# Altium PCB PCB1.PcbDoc
Units mm, origin at the board's own origin, x right, y up, seen from the top; angles counter-clockwise.
Board outline 29.05 x 20.1 mm, 2 copper layers (Top Layer, Bottom Layer); 21 components, 16 nets, 84 pads, 66 vias.
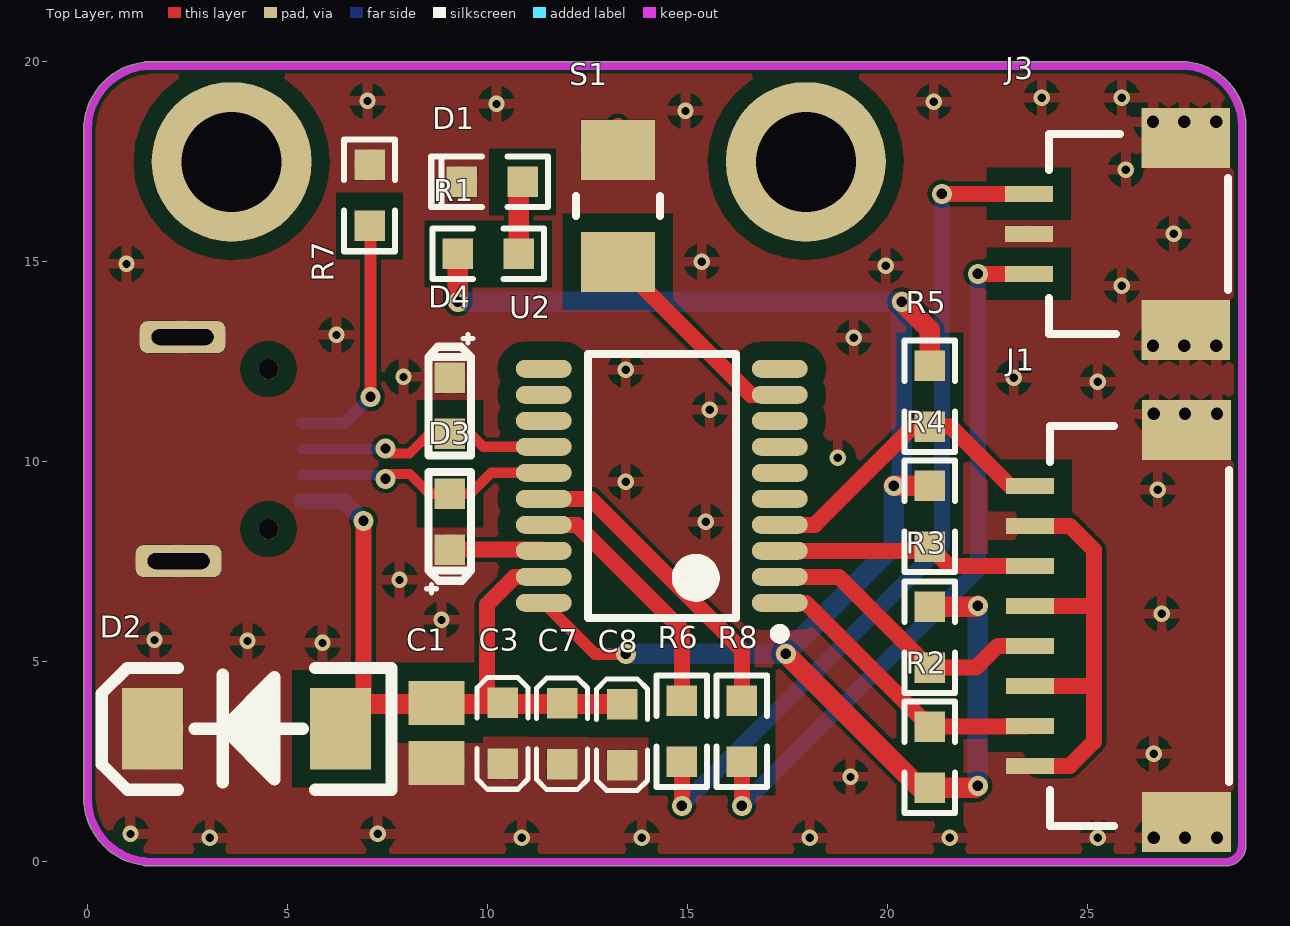
[diagram p0: Top Layer view]
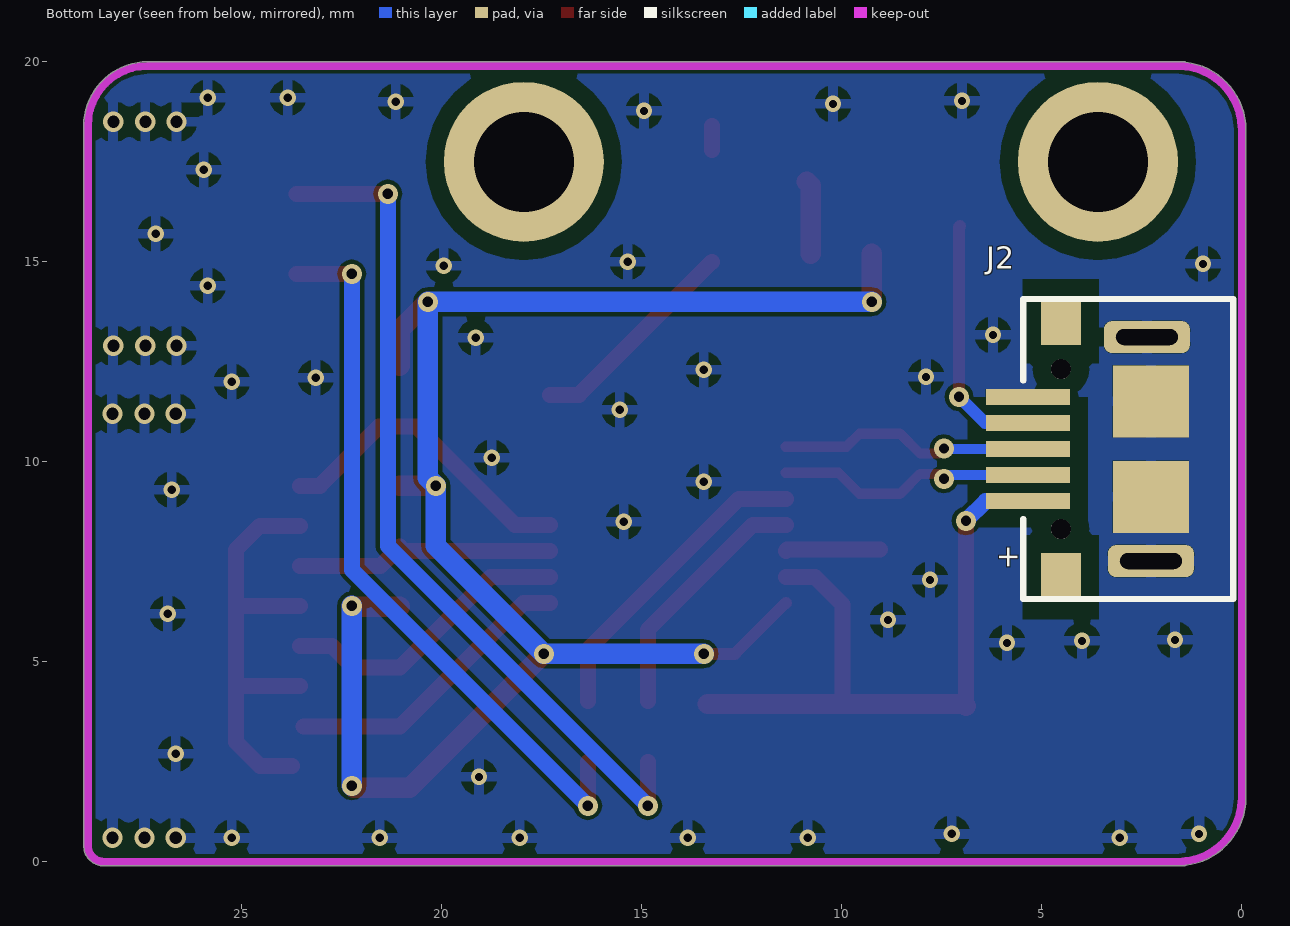
[diagram p1: Bottom Layer view, seen from below]
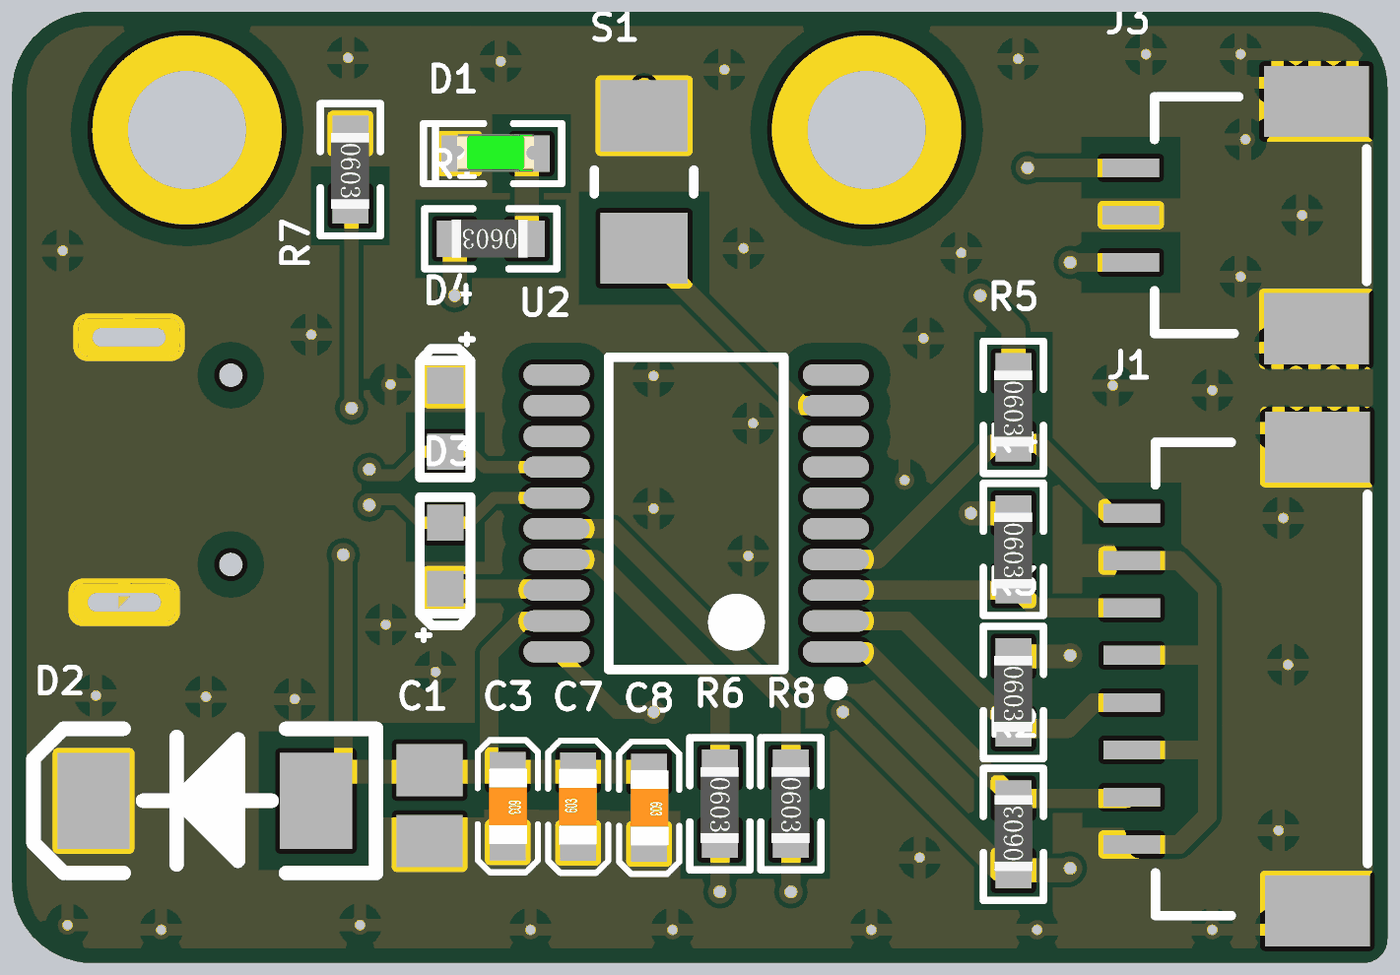
[diagram p2: 3D render of the assembled board from above, using the file's embedded part models]

## Layer stack, top to bottom
Top Solder: solder mask 0.0102, Solder Resist, Dk 3.5
Top Layer: signal copper 0.0356
Dielectric 1: dielectric 0.32, FR-4, Dk 4.8
Bottom Layer: signal copper 0.0356
Bottom Solder: solder mask 0.0102, Solder Resist, Dk 3.5

## Board outline
1.408,-0.089 cw(c1.605,1.6) -0.095,1.6 cw(c0.005,1.6) -0.095,1.601 -0.095,18.3 cw(c1.605,18.3) 1.408,19.989 cw(c1.455,19.9) 1.455,20 27.355,20 cw(c27.355,18.4) 28.955,18.4 28.955,0.4 cw(c28.455,0.4) 28.455,-0.1 1.455,-0.1 cw(c1.455,0)

## Design rules (kind name [scope] priority, off if disabled: settings)
Clearance Clearance_1 [All] p1: gap=0.1 except(0.45: SMDPad-Poly THPad-Poly)
DiffPairsRouting [All] p1: maxlimit=0.254 minlimit=0.254 mostfreqgap=0.254 toplayer_minwidth=0.254 toplayer_maxwidth=0.381 toplayer_prefwidth=0.254 bottomlayer_minwidth=0.254 bottomlayer_maxwidth=0.381 bottomlayer_prefwidth=0.254 maxuncoupledlength=12.7
MinimumSolderMaskSliver [All] p1: minsoldermaskwidth=0.051
PlaneConnect PlaneConnect_1 [All] p1: planeconnectstyle=Relief reliefexpansion=0.508 reliefentries=4 reliefconductorwidth=0.254 reliefairgap=0.254
PolygonConnect [ISVIA] p1: connectstyle=Relief reliefconductorwidth=0.254 reliefentries=4 polygonreliefangle="90 Angle" airgapwidth=0.254
RoutingVias [All] p1: holewidth=0.254 width=0.5 viastyle="Through Hole" minholewidth=0.254 minwidth=0.5 maxholewidth=0.3 maxwidth=0.8
SilkToSilkClearance [All] p1: silktosilkclearance=0.051
SilkToSolderMaskClearance [IsPad] p1: minsilkscreentomaskgap=0.051 clearancetoexposedcopper=TRUE
SolderMaskExpansion [All] p1: expansion=0.102
Width [All] p1: maxlimit=0.8 minlimit=0.254 preferedwidth=0.3
25 further rules are at their usual default settings.

## Classes and differential pairs
differential pair NewDifferentialPair1: +DP -DM

## Components (designator, comment, footprint, x,y, rotation, side; value= is the part's Value field where it differs from the comment)
C1 "226M50V" C0805 8.725,3.223 r270 top
C3 "105K16V" C0603 10.375,3.972 r270 top
C7 "106K50V" C0603 11.861,2.438 r90 top
C8 "104K50V" C0603 13.361,3.938 r270 top
D1 "LED0603G" D-LED0603G 10.879,17 r180 top
D2 "SMAJ5.0CA" DO-214 6.325,3.323 r180 top
D3 "ESDA_TR1/0603" HS_0603D 9.055,8.501 r90 top
D4 "ESDA_TR1/0603" HS_0603D 9.055,11.4 r270 top
J1 "SH1.0-T-1-LT-8A_卧式" J-SH1.0-T-1-LT-8A_卧式 23.555,2.4 r90 top
J2 "USB-MINI-SOCKET" "MICRO-USB - 5.9" 0.218,6.568 r90 bottom
J3 "SH1.0-T-1-LT-3A_卧式" J-SH1.0-T-1-LT-3A_卧式 23.535,14.7 r90 top
R1 "2K" R0603 10.779,15.2 r180 top
R2 "82K" R0603 21.055,1.852 r90 top
R3 "82K" R0603 21.055,6.376 r270 top
R4 "82K" R0603 21.055,9.4 r270 top
R5 "82K" R0603 21.055,12.4 r270 top
R6 "22R" R0603 14.855,4.024 r270 top
R7 "0R" R0603 7.05,17.422 r270 top
R8 "22R" R0603 16.355,4.024 r270 top
S1 "2*3*0.65" "S-K2*3 - duplicate" 13.255,16.4 r90 top
U2 "CH559T" TSSOP20 14.355,9.4 r180 top

## Footprints (in the part's own frame and the unit in brackets; to place one, negate y for a bottom-side part, rotate by r counter-clockwise, add the part's x,y. Pads: shape width x height; smd on the part's side, far side on the other; paste and mask are expansions set on the pad)
C0603 [mil]
  rect 30x30 smd: 1(0,0) 2(60,0)
  silkscreen extent -25,-25 85,25, body extent -1,-15 61,16, height 12
C0805 [mm] "Chip Capacitor, Body 2.0x1.3mm, IPC High Density"
  rect 1.1x1.4 smd: 1(-0.75,0) 2(0.75,0)
  body extent -1.1,-0.72 1.1,0.72, height 1.4
D-LED0603G [mil]
  rect 30x30 smd: 1(0,0) 2(60,0)
  silkscreen extent -25,-25 90,25, body extent -2,-16 62,15, height 24
DO-214 [mil]
  rect 60x80 smd: 1(0,0) 2(185,0)
  silkscreen extent -50,-60 235,60
HS_0603D [mil]
  rect 30x30 smd: 1(-27.5,0) 2(27.5,0)
  silkscreen extent -70,-21 49,23
J-SH1.0-T-1-LT-3A_卧式 [mm]
  rect 0.4x1.2 smd: 1(0,0) 2(1,0) 3(2,0)
  rect 1.5x2.22 smd: 4(-1.4,-3.92) 5(3.4,-3.92)
  silkscreen extent -1.5,-4.98 3.5,-0.5
J-SH1.0-T-1-LT-8A_卧式 [mm]
  rect 0.4x1.2 smd: 1(0,0) 2(1,0) 3(2,0) 4(3,0) 5(4,0) 6(5,0) 7(6,0) 8(7,0)
  rect 1.5x2.22 smd: 9(-1.4,-3.92) 10(8.4,-3.92)
  silkscreen extent -1.5,-4.98 8.5,-0.5
"MICRO-USB - 5.9" [mm]
  rect 1.2x1 smd: 0(0.55,4.307) 0(6.95,4.307)
  rect 0.4x2.1 smd: 1(2.45,5.132) 2(3.1,5.132) 3(3.75,5.132) 4(4.4,5.132) 5(5.05,5.132)
  rrect50% 0.8x2.15 hole 0.4 slot 1.55 at 90 deg: 6(0.95,2.057) 6(6.55,2.157)
  rect 1.8x1.9 smd: 6(2.556,2.057) 6(4.943,2.057)
  round 0.5 hole 0.5 unplated: ""(1.75,4.307) ""(5.75,4.307)
  silkscreen extent 0,0 7.5,5.25
R0603 [mil]
  rect 30x30 smd: 1(0,0) 2(60,0)
  silkscreen extent -25,-25 85,25, body extent 0,-16 62,15, height 18
"S-K2*3 - duplicate" [mm] "Precision Wire Wound Inductor, 2-Leads, Body 3.00x2.00mm, IPC Medium Density"
  rect 1.5x1.85 smd: 1(-1.4,0) 2(1.4,0)
  silkscreen extent -0.25,-1.05 0.25,1.05, body extent -1.55,-1.05 1.55,1.05, height 0.65
TSSOP20 [mm] "TSOP, 20-Leads, Body 6.50x4.40mm, Pitch 0.65mm, IPC Medium Density"
  oval 1.4x0.45 smd: 1(-2.95,2.925) 2(-2.95,2.275) 3(-2.95,1.625) 4(-2.95,0.975) 5(-2.95,0.325) 6(-2.95,-0.325) 7(-2.95,-0.975) 8(-2.95,-1.625) 9(-2.95,-2.275) 10(-2.95,-2.925) 11(2.95,-2.925) 12(2.95,-2.275) 13(2.95,-1.625) 14(2.95,-0.975) 15(2.95,-0.325) 16(2.95,0.325) 17(2.95,0.975) 18(2.95,1.625) 19(2.95,2.275) 20(2.95,2.925)
  silkscreen extent -3.08,-3.3 1.85,3.82, body extent -2.25,-3.3 2.25,3.3, height 1.2

## Part data
C1: library part C0805Y5V-226M50V, "贴片电容-陶瓷"
C3: library part C0603X7R-105K16V, "贴片电容-陶瓷"
C7: library part C0603X7R-106K50V, "贴片电容-陶瓷"
C8: library part C0603X7R-104K50V, "贴片电容-陶瓷"
D1: library part DLED-0603-G, "贴片二极管-LED"
D3 D4: library part "D Zener", "Zener Diode"
J1: "SH1.0-T-1-LT-6A_卧式"
J2: library part J-USB-MINI-SOCKET, "USB-A卧式插座"
R1 R2 R3 R4 R5 R6 R8: library part R0603-100RF, "贴片电阻-通用"
R7: library part R0603-0R, "贴片电阻-通用"
S1: library part "2*3*0.65 薄膜按键", "薄膜按键"
U2: "usb通信"

## Free pads (board coordinates)
  round 4 hole 2.5: 0(3.6,17.5) 0(17.955,17.5)

## Via types
v1: diameter 0.406, hole 0.203, Top Layer to Bottom Layer, tented both sides, 39 vias
v2: diameter 0.5, hole 0.254, Top Layer to Bottom Layer, tented both sides, 15 vias
v3: diameter 0.508, hole 0.305, Top Layer to Bottom Layer, tented both sides, 12 vias

## Nets (pads, with @x,y where several pads share a name; then routed paths per layer and width w, separated by ;. In a path a pad name is that pad's centre, name@x,y a point inside that pad or via, vN(x,y) a via of type N, cw(c..) or ccw(c..) an arc to the next point about the centre after c; other vN are vias at no path point)
3.3V_VCC: R1.2 R2.1 R3.1 R4.1 R5.1 U2.20 | length 43.6
  Top Layer w0.3: U2.20 12.68,5.2 v2(13.455,5.2)
  Top Layer w0.508: v2(9.255,14) R1.2 ; v2(17.455,5.2) 20.803,1.852 R2.1 22.207,1.852 v2(22.255,1.9) ; v2(20.155,9.4) R4.1 ; v2(20.355,14) 21.055,13.3 R5.1 ; R3.1 22.231,6.376 v2(22.255,6.4)
  Bottom Layer w0.508: v2(9.255,14) v2(20.355,14) 20.355,9.6 v2(20.155,9.4) 20.155,7.9 v2(17.455,5.2) v2(13.455,5.2) ; v2(22.255,1.9) v2(22.255,6.4)
5V_VCC: C1.1 C3.1 C7.2 C8.1 D2.1 J2.1 U2.19 | length 17.1
  Top Layer w0.4: D2.1@6.9,3.898 v2(6.9,8.523) ; 9.981,3.938 9.981,6.43 10.677,7.125 U2.19
  Top Layer w0.5: D2.1@6.9,3.898 6.94,3.938 9.981,3.938 C8.1
  Bottom Layer w0.4: J2.1 6.406,9.018 v2(6.9,8.523)
DM: D3.2 J2.2 U2.15 | length 6.6
  Top Layer w0.254: v2(7.45,9.574) 7.573,9.697 8.05,9.697 8.547,9.2 D3.2 9.563,9.2 10.088,9.725 U2.15
  Bottom Layer w0.254: J2.2 7.356,9.668 v2(7.45,9.574)
DP: D4.2 J2.3 U2.14 | length 6.5
  Top Layer w0.254: v2(7.45,10.328) 7.573,10.205 8.05,10.205 8.547,10.702 D4.2 9.563,10.702 9.889,10.375 U2.14
  Bottom Layer w0.254: J2.3 7.44,10.318 v2(7.45,10.328)
GND: C1.2 C3.2 C7.1 C8.2 D1.2 D2.2 D3.1 D4.1 J1.1 J1.3 J1.5 J1.7 J1.9 J1.10 J2.5 J2.6 J3.2 J3.4 J3.5 R7.1 S1.2 U2.18 | length 14.5
  Top Layer w0.4: D3.1 11.377,7.803 U2.18 ; S1.2 S1.2@13.255,18.4 ; J1.3 25.055,4.4 25.155,4.5 ; J1.5 25.055,6.4 25.155,6.5 ; J1.7 24.555,8.4 25.155,7.8 25.155,6.5 ; J1.1@23.755,2.4 24.555,2.4 25.155,3 25.155,4.5 ; 25.155,4.5 25.155,6.5
  other v1: 3.055,0.6 10.855,0.6 13.855,0.6 18.055,0.6 21.555,0.6 25.255,0.6 1.075,0.698 7.255,0.7 19.075,2.123 26.655,2.7 5.875,5.473 4,5.523 1.675,5.548 8.85,6.048 26.855,6.2 7.8,7.048 15.455,8.5 26.755,9.3 13.455,9.5 18.755,10.1 15.555,11.3 25.255,12 23.155,12.1 7.9,12.123 13.455,12.3 19.155,13.1 6.225,13.173 25.855,14.4 19.955,14.9 0.975,14.948 15.355,15 27.155,15.7 25.955,17.3 14.95,18.773 10.225,18.948 21.155,19 7,19.023 23.855,19.1 25.855,19.1
  other v3: 26.655,0.6 27.435,0.6 28.235,0.6 26.655,11.2 27.435,11.2 28.235,11.2 26.635,12.9 27.415,12.9 28.215,12.9 26.635,18.5 27.415,18.5 28.215,18.5
LEFTL: J1.2 R2.2 U2.1 | length 7.4
  Top Layer w0.4: U2.1 17.956,6.475 R2.2 J1.2@23.459,3.376
MOUTH: J1.6 R4.2 U2.3 | length 6.5
  Top Layer w0.4: U2.3 20.954,7.775 R4.2 21.531,7.4 J1.6
NetD1_1: D1.1 R1.1 | length 1.8
  Top Layer w0.508: R1.1 10.779,16.9 D1.1
NetJ2_4: J2.4 R7.2 | length 6.3
  Top Layer w0.3: R7.2 7.075,15.873 v2(7.075,11.623)
  Bottom Layer w0.3: J2.4 6.419,10.968 v2(7.075,11.623)
NetJ3_1: J3.1 R8.2 | length 18.2
  Top Layer w0.4: v2(16.355,1.4) R8.2 ; v2(22.255,14.7) J3.1 J3.1@23.635,14.7
  Bottom Layer w0.4: v2(16.355,1.4) 22.255,7.3 v2(22.255,14.7)
NetJ3_3: J3.3 R6.2 | length 21.4
  Top Layer w0.4: v2(14.855,1.4) R6.2 ; v2(21.355,16.7) J3.3 J3.3@23.635,16.7
  Bottom Layer w0.4: v2(14.855,1.4) 21.355,7.9 v2(21.355,16.7)
NetS1_1: S1.1 U2.9 | length 5.4
  Top Layer w0.4: S1.1 16.58,11.675 U2.9
RIGHTL: J1.4 R3.2 U2.2 | length 7.4
  Top Layer w0.4: U2.2 18.782,7.125 R3.2 22.207,4.852 22.755,5.4 J1.4
RXD: R6.1 U2.17 | length 6.3
  Top Layer w0.4: U2.17 12.23,8.425 14.855,5.8 R6.1
TUMMY: J1.8 R5.2 U2.4 | length 7.9
  Top Layer w0.4: U2.4 18.18,8.425 20.631,10.876 R5.2 21.579,10.876 23.055,9.4 J1.8
TXD: R8.1 U2.16 | length 7.8
  Top Layer w0.4: U2.16 12.58,9.075 16.355,5.3 R8.1
pads on no net: J2. J2.0 U2.5 U2.6 U2.7 U2.8 U2.10 U2.11 U2.12 U2.13

## Polygon pours and split planes (outlines as drawn)
GND on Bottom Layer "top" (solid, remove dead copper, pour order 18): 0.1,19.9 0,19.8 0,0 28.809,0 28.855,0.046 28.75,0.151 28.75,19.925 0.075,19.925 0.05,19.9
GND on Top Layer "top" (solid, remove dead copper, pour order 20): 0.05,19.925 0.025,19.9 0.025,0 28.809,0 28.855,0.046 28.8,0.101 28.8,19.9 0.175,19.9 0.075,19.8

## Keep-outs
Keep-Out Layer:
  lines w0.2: 1.455,0 28.455,0 ccw(c28.455,0.4) 28.855,0.4 28.855,18.4 ccw(c27.355,18.4) 27.355,19.9 1.455,19.9 ; 1.605,0 cw(c1.605,1.6) 0.005,1.6 0.005,18.3 cw(c1.605,18.3) 1.605,19.9

## Dimensions
0.005,18.3 to 28.855,18.4 on Keep-Out Layer
1.605,19.9 to 1.605,0 on Keep-Out Layer

## Text inside footprints (layer, text, board x,y; h text height)
J2: Bottom Overlay "+" at 5.602,7.304 h0.55 r270